# EAGLE board bottom-plate (EAGLE 9.6.2)

Size 137 x 93.56 mm. Coordinates in mm from the lower left corner, seen from the top.
Outline: 37,87.56 1.5,87.56 arc90 0,86.06 0,32.06 arc90 1.5,30.56 50.22,30.56 arc-45 51.28,30.12 66.59,14.8 arc37 67.45,14.38 105.78,8.99 arc-22 106.32,8.8 121.22,0.2 arc90 123.27,0.75 136.8,24.21 arc30 137,24.96 137,88.06 arc90 135.5,89.56 96,89.56 arc-90 95,90.56 arc90 94,91.56 77,91.56 arc-90 76,92.56 arc90 75,93.56 58,93.56 arc90 57,92.56 arc-90 56,91.56 39,91.56 arc90 38,90.56 38,88.56 arc-90 37,87.56
Copper layers (1*16): Top 0.035mm / dielectric 1.5mm / Bottom 0.035mm
Design rules "default": minimum track width 6mil, minimum drill 0.35mm, track to track 6mil, track to pad 6mil, pad to pad 6mil, via to via 6mil, smd to smd 6mil, copper to edge 40mil, drill to drill 6mil, minimum pad ring 10mil, minimum via ring 8mil, stop-mask expansion 4mil, vias tented up to drill 0mil, thermal gap 10mil

## Footprints (pad centres in the part's own frame; a part is rotated, then mirrored left to right if it is on the bottom)
HOLE-M2 = drill 2.6: P$1 0,0

## Placement (x,y rotation side)
E$1  [HOLE-M2]  19,49.56 0 top
E$2  [HOLE-M2]  19,68.56 0 top
E$3  [HOLE-M2]  76,73.56 0 top
E$4  [HOLE-M2]  61,30.56 0 top
E$5  [HOLE-M2]  116,31.56 0 top

## Library data of the parts
E$1-E$5 = platedhole